# EAGLE board arduino_smartsensor_shield (EAGLE 7.4.0)
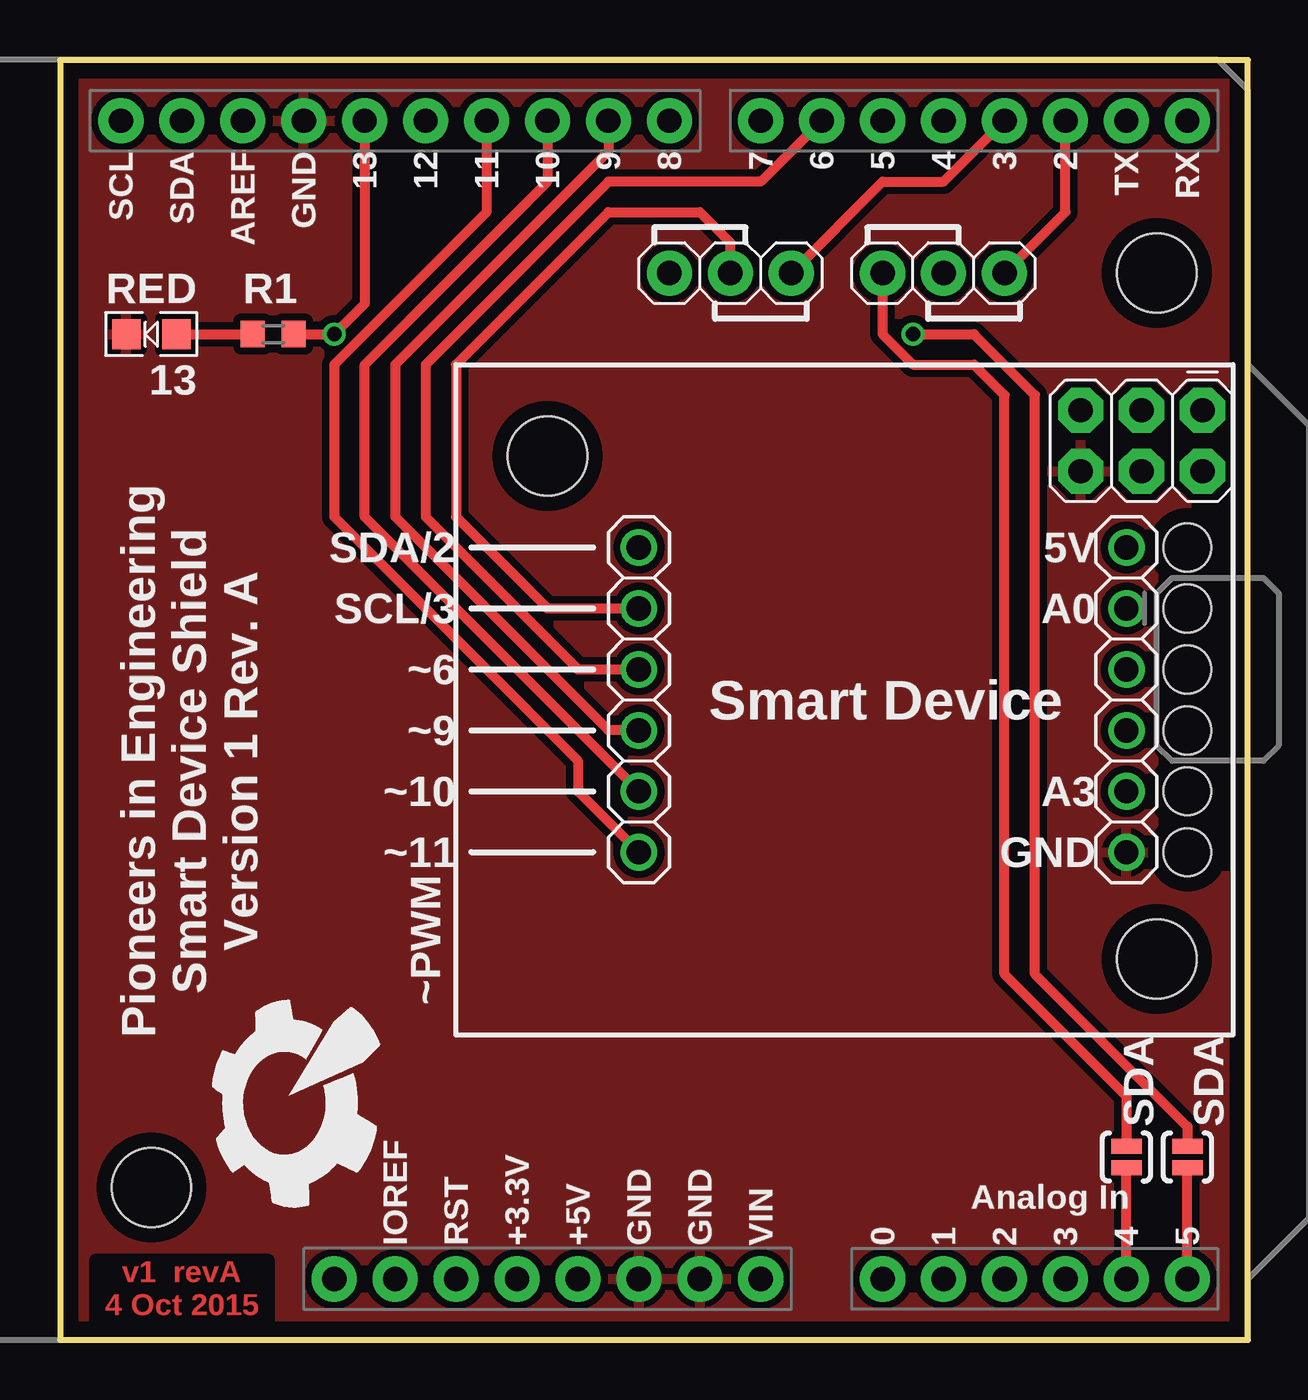
[diagram p0: board, top side]
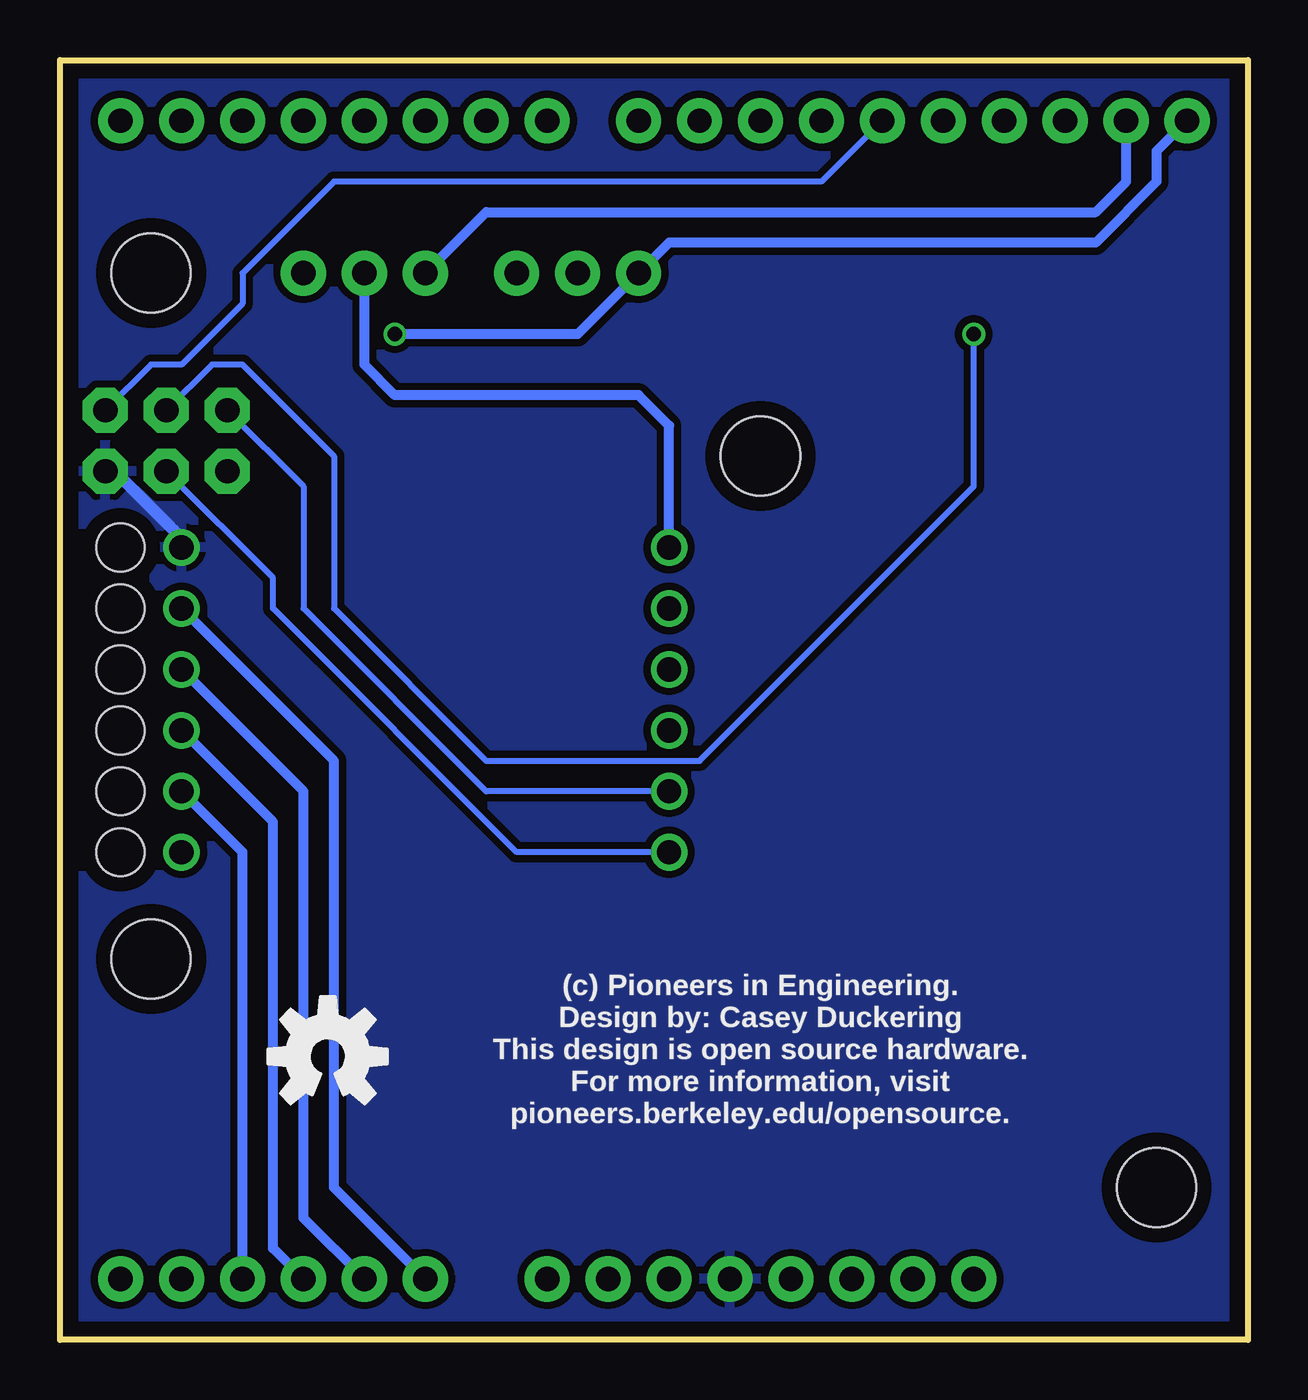
[diagram p1: board, bottom side, seen from below]

Size 49.52 x 53.33 mm. Coordinates in mm from the lower left corner, seen from the top.
Outline: 0,0 49.52,0 49.52,53.33 0,53.33 0,0
Copper layers (1*16): Top 2mil / dielectric 9mil / Bottom 2mil
Design rules "advancedcircuits-33each-pie": minimum track width 6mil, minimum drill 15mil, track to track 6mil, track to pad 6mil, pad to pad 6mil, via to via 6mil, smd to smd 6mil, copper to edge 25mil, drill to drill 7mil, minimum pad ring 7mil, minimum via ring 7mil, stop-mask expansion 3mil, vias tented up to drill 21mil, thermal gap 10mil

## Footprints (pad centres in the part's own frame; a part is rotated, then mirrored left to right if it is on the bottom)
LED-0805 = smd 1.194 x 1.245: A -1.041,0; C 1.041,0
STAND-OFF = hole 3.302: 0,0
UNO_R3_SHIELD = drill 1.016 pad 1.88: 3.3V 50.8,26.67; 5V 50.8,29.21; A0 50.8,41.91; A1 50.8,44.45; A2 50.8,46.99; A3 50.8,49.53; A4 50.8,52.07; A5 50.8,54.61; AREF 2.54,15.24; D2 2.54,49.53; D3 2.54,46.99; D4 2.54,44.45; D5 2.54,41.91; D6 2.54,39.37; D7 2.54,36.83; D8 2.54,33.02; D9 2.54,30.48; D10 2.54,27.94; D11 2.54,25.4; D12 2.54,22.86; D13 2.54,20.32; GND@0 50.8,31.75; GND@1 50.8,34.29; GND@2 2.54,17.78; IOREF 50.8,21.59; NC 50.8,19.05; RES 50.8,24.13; RX 2.54,54.61; SCL 2.54,10.16; SDA 2.54,12.7; TX 2.54,52.07; VIN 50.8,36.83
2X3 = drill 1.016 pad 1.88 octagon: 1 0,0; 2 0,2.54; 3 2.54,0; 4 2.54,2.54; 5 5.08,0; 6 5.08,2.54
1X06-STRAINRELIEF = drill 1.016 pad 1.524: 1 -6.35,0; 2 -3.81,0; 3 -1.27,0; 4 1.27,0; 5 3.81,0; 6 6.35,0 | hole 2: -6.35,-2.54; -3.81,-2.54; -1.27,-2.54; 1.27,-2.54; 3.81,-2.54; 6.35,-2.54
1X06 = drill 1.016 pad 1.524: 1 -6.35,0; 2 -3.81,0; 3 -1.27,0; 4 1.27,0; 5 3.81,0; 6 6.35,0
1X03-JMP-OPTION = drill 1.016 pad 1.88: 1 -2.54,0; 2 0,0; 3 2.54,0
R0603 = smd 1 x 1.1: 1 -0.85,0; 2 0.85,0
SJ_2S-NO = smd 0.635 x 1.27: 1 -0.45,0; 2 0.45,0

## Placement (x,y rotation side)
13  RED  [LED-0805]  3.81,41.91 180 top
HOLE1  [STAND-OFF]  20.32,36.83 0 top
HOLE2  [STAND-OFF]  45.72,15.88 0 top
HOLE3  [STAND-OFF]  3.81,6.35 0 top
HOLE4  [STAND-OFF]  45.72,44.45 0 top
J1  ARDUINO_R3_SHIELD  [UNO_R3_SHIELD]  -7.62,53.34 270 top
J2  ISP  [2X3]  47.62,38.73 180 top
JP1  [1X06-STRAINRELIEF]  44.45,26.67 90 top
JP2  [1X06]  24.13,26.67 90 top
JP6  D2  [1X03-JMP-OPTION]  36.83,44.45 180 top
JP7  D3  [1X03-JMP-OPTION]  27.94,44.45 180 top
R1  130  [R0603]  8.89,41.91 0 top
SJ1  A4-  [SJ_2S-NO]  44.45,7.62 90 top
SJ2  A5-  [SJ_2S-NO]  46.99,7.62 90 top
U$1  [PIE-LOGO-SMALL]  9.53,10.16 90 top
U$3  [OSHW-LOGO-M]  38.35,11.81 0 bottom

## Library data of the parts
13 = pie; PIE-INT-REF-NUM: LED
HOLE1-HOLE4 JP1 U$1 U$3 = pie
J1 = SparkFun-Boards
J2 = pie; PIE-INT-REF-NUM: BULK-STOCK
JP2 = pie; PARTNUMBER: 965
JP6 = pie; VALUE2: SDA
JP7 = pie; VALUE2: SCL
R1 = pie; PIE-INT-REF-NUM: RESISTOR-GENERIC
SJ1 SJ2 = pie; PIE-INT-REF-NUM: DNL

## Nets
5V: J1.5V J2.2 JP1.6
12: J1.D12 J2.1
A4: J1.A4 SJ1.1
A5: J1.A5 SJ2.1
D2: J1.D2 JP6.1
D3: J1.D3 JP7.1
GND: 13.C J1.GND@0 J1.GND@1 J1.GND@2 J2.6 JP1.1
IO0: J1.A0 JP1.5
IO1: J1.A1 JP1.4
IO2: J1.A2 JP1.3
IO3: J1.A3 JP1.2
IO4: JP2.6 JP6.2
IO5: JP2.5 JP7.2
IO6: J1.D6 JP2.4
IO7: J1.D9 JP2.3
IO8: J1.D10 J2.5 JP2.2
IO9: J1.D11 J2.4 JP2.1
LED: J1.D13 J2.3 R1.2
N$1: 13.A R1.1
SCL: J1.SCL JP7.3 SJ2.2
SDA: J1.SDA JP6.3 SJ1.2

## Tracks (layer width: path | path; a pad name or v marks a point on that pad's centre or on a via)
5V
  Bottom 0.508: JP1.6 44.45,33.4 47.24,36.2 J2.2
  pour Bottom (isolate 0.305): 0,0 0,53.34 49.53,53.34 49.53,0
12
  Bottom 0.254: J1.D12 17.78,48.26 38.1,48.26 41.91,44.45 41.91,43.18 44.45,40.64 45.72,40.64 J2.1
A4
  Top 0.406: J1.A4 SJ1.1
A5
  Top 0.406: J1.A5 SJ2.1
D2
  Top 0.406: JP6.1 41.91,46.99 J1.D2
D3
  Top 0.406: JP7.1 34.29,48.26 36.83,48.26 J1.D3
GND
  pour Top (isolate 0.305): 0,0 0,53.34 49.53,53.34 49.53,0
IO0
  Bottom 0.406: JP1.5 38.1,24.13 38.1,6.35 J1.A0
IO1
  Bottom 0.406: JP1.4 39.37,22.86 39.37,5.08 J1.A1
IO2
  Bottom 0.406: JP1.3 40.64,21.59 40.64,3.81 J1.A2
IO3
  Bottom 0.406: J1.A3 41.91,20.32 JP1.2
IO4
  Bottom 0.406: JP2.6 24.13,38.1 25.4,39.37 35.56,39.37 36.83,40.64 JP6.2
IO5
  Top 0.406: JP7.2 27.94,45.72 26.67,46.99 22.86,46.99 16.51,40.64 16.51,34.29 20.32,30.48 JP2.5
IO6
  Top 0.406: J1.D6 29.21,48.26 22.86,48.26 15.24,40.64 15.24,34.29 21.59,27.94 JP2.4
IO7
  Top 0.406: J1.D9 22.86,49.53 13.97,40.64 13.97,34.29 22.86,25.4 JP2.3
IO8
  Top 0.406: J1.D10 20.32,48.26 12.7,40.64 12.7,34.29 JP2.2
  Bottom 0.254: JP2.2 31.75,22.86 39.37,30.48 39.37,35.56 J2.5
IO9
  Top 0.406: J1.D11 17.78,46.99 11.43,40.64 11.43,34.29 21.59,24.13 21.59,22.86 JP2.1
  Bottom 0.254: JP2.1 30.48,20.32 40.64,30.48 40.64,31.75 J2.4
LED  (via drill 0.6)
  Top 0.406: J1.D13 12.7,43.18 v11.43,41.91 R1.2
  Bottom 0.254: v11.43,41.91 11.43,35.56 22.86,24.13 31.75,24.13 38.1,30.48 38.1,36.83 41.91,40.64 43.18,40.64 J2.3
N$1
  Top 0.406: 13.A R1.1
SCL  (via drill 0.6)
  Top 0.406: v35.56,41.91 38.1,41.91 40.64,39.37 40.64,15.24 46.99,8.89 SJ2.2
  Bottom 0.406: J1.SCL 3.81,49.53 3.81,48.26 6.35,45.72 24.13,45.72 JP7.3 27.94,41.91 v35.56,41.91
SDA
  Top 0.406: JP6.3 34.29,41.91 35.56,40.64 38.1,40.64 39.37,39.37 39.37,15.24 44.45,10.16 SJ1.2
  Bottom 0.406: JP6.3 31.75,46.99 6.35,46.99 5.08,48.26 J1.SDA

## Text on the board
Top: v1 revA / 4 Oct 2015
tPlace: Smart Device | Pioneers in Engineering / Smart Device Shield / Version 1 Rev. A
bPlace: (c) Pioneers in Engineering. / Design by: Casey Duckering / This design is open source hardware. / For more information, visit / pioneers.berkeley.edu/opensource.
tNames: SDA/2 | 5V | SCL/3 | A0 | ~6 | ~9 | ~10 | A3 | ~11 | GND | ~PWM | SDA | SDA